# Altium PCB netuitval.PcbDoc (part 2 of 2)
Units mil, origin at the board's own origin, x right, y up, seen from the top; angles counter-clockwise.
Board outline 3892 x 5388 mil, 2 copper layers (Top Layer, Bottom Layer); 66 components, 53 nets, 247 pads, 55 vias.
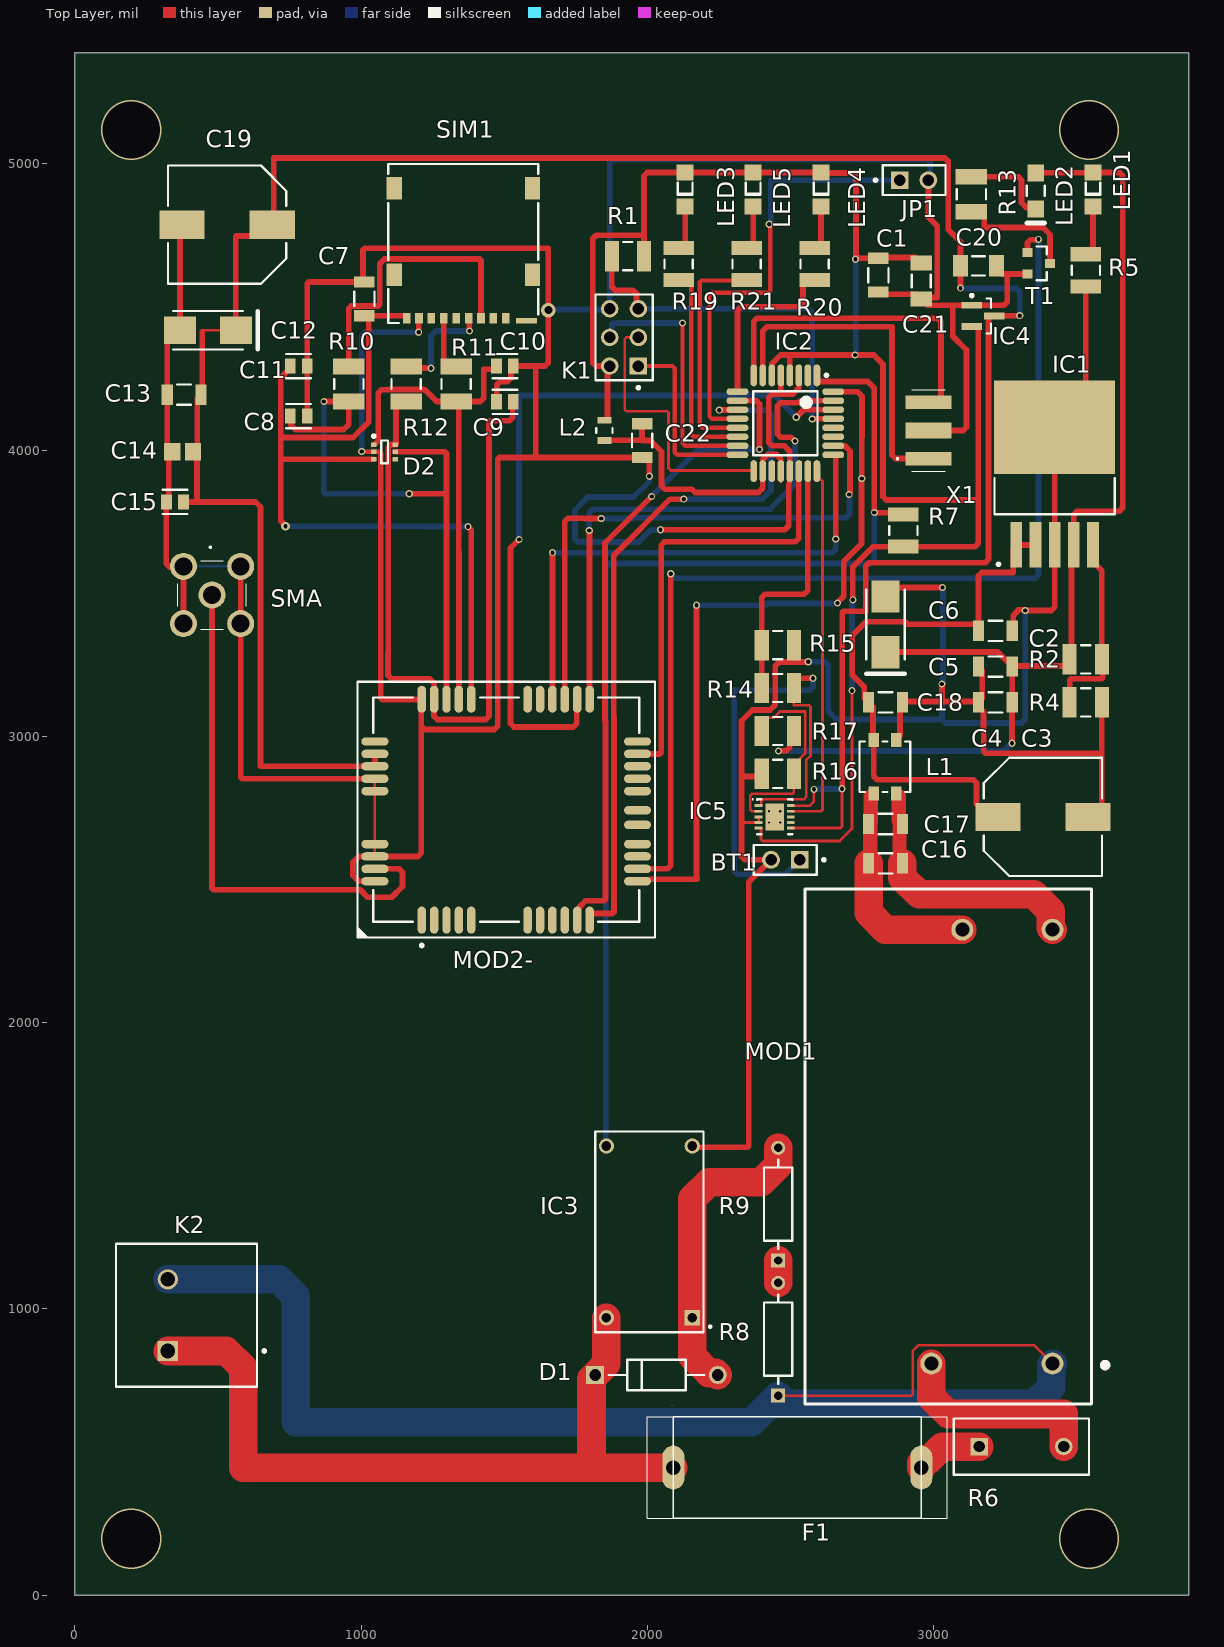
[diagram p0: Top Layer view]

## Via types
v1: diameter 25, hole 15, Top Layer to Bottom Layer, 45 vias
v2: diameter 210, hole 200, Top Layer to Bottom Layer, 4 vias
v3: diameter 19.68, hole 7.87, Top Layer to Bottom Layer, 4 vias
v4: diameter 50, hole 28, Top Layer to Bottom Layer, 1 vias
v5: diameter 30, hole 15, Top Layer to Bottom Layer, 1 vias

## Nets (pads, with @x,y where several pads share a name; then routed paths per layer and width w, separated by ;. In a path a pad name is that pad's centre, name@x,y a point inside that pad or via, vN(x,y) a via of type N, cw(c..) or ccw(c..) an arc to the next point about the centre after c; other vN are vias at no path point) (continued)
RXD: (continued)
  Top Layer w20: v1(1797,3719) 1797.67,3718.33 1797.67,3130.5 MOD2-.21 ; v1(2516,4032) 2514.65,4032 2501.58,4045.06 2466.22,4045.06 2454.5,4056.78 2454.5,4154.28 2466.22,4166 2528.93,4166 2535.67,4172.74 2609.26,4172.74
  Bottom Layer w20: v1(1797,3719) 1797,3782.28 1808.72,3794 2429,3794 2516,3881 v1(2516,4032)
SCK: IC2.17 K1.3 | length 950.1
  Top Layer w9: K1.3 1926.27,4394 1921,4388.73 1921,4141.27 1926.27,4136 2068.58,4136 2073.85,4130.73 2073.85,3937.42 2082.27,3929 2369.44,3929 IC2.17
SIM1_CLK: C9.2 D2.6 MOD2-.30 R12.2 | length 2677.9
  Top Layer w9: R12.2@1122.07,4169.98 R12.2 ; MOD2-.30@1255.03,3091 MOD2-.30
  Top Layer w20: R12.2@1122.07,4169.98 1122.07,4019.59 D2.6 1105.59,4019.59 1095,4009 1095,3289.86 1093.82,3288.68 1093.82,3213.54 1105.54,3201.82 1238.46,3201.82 1256,3184.28 1256,3130.79 MOD2-.30 ; MOD2-.30@1255.03,3091 1255.03,3070.72 1266.75,3059 1435.28,3059 1447,3070.72 1447,4102.73 1518.28,4102.73 1530,4114.44 1530,4167 C9.2
SIM1_DATA: C8.1 D2.5 MOD2-.29 R10.1 | length 2202.6
  Top Layer w9: 1293.07,3994 1298.34,3988.73
  Top Layer w20: C8.1 755,4116.47 755,4087.72 770.72,4072 939,4072 957,4090 R10.1 v1(869.95,4169.98) ; D2.5 1293.07,3994 ; v1(1168,3848) 1298.34,3848 ; MOD2-.29 1298.34,3848 ; 1298.34,3988.73 1298.34,3848
  Bottom Layer w9: 869.95,3853.27 875.22,3848
  Bottom Layer w20: 869.95,3853.27 v1(869.95,4169.98) ; 875.22,3848 v1(1168,3848)
SIM1_RST: C10.1 D2.1 MOD2-.28 R11.2 | length 1759.6
  Top Layer w9: 1094.83,4211 1095.88,4212.04 ; 1218.12,4212.04 1219.17,4211 1223,4211 ; 1341,3645.65 1341.65,3645
  Top Layer w20: D2.1@1049.94,4022.96 1060,4033.02 1060,4199.28 1071.72,4211 1094.83,4211 ; 1095.88,4212.04 1218.12,4212.04 ; 1223,4211 1264.02,4169.98 R11.2 1416.28,4169.98 1428,4181.7 1428,4282.28 1464.24,4282.28 1472.94,4290.98 C10.1 ; 1341,3645.65 R11.2@1341,4160.98 ; MOD2-.28 1341.65,3645
SIM1_VDD: C7.1 C11.1 D2.3 MOD2-.27 SIM1.C1 | length 3031
  Top Layer w9: 719,3967 720.41,3968.41 ; C7.1 1015.87,4469.72 C7.1@1031.06,4454.54 ; SIM1.C1@1150.28,4469.72 1158.97,4461.03 SIM1.C1 ; MOD2-.27 MOD2-.27@1388.88,3133.75
  Top Layer w20: 720.41,3968.41 D2.3 ; v5(736,3734) 736,3736.71 719,3753.71 719,3967 719,4044 ; C11.1 752.47,4286.13 719,4252.65 719,4044 ; C7.1@1007,4469.72 SIM1.C1@1150.28,4469.72 ; C7.1@1026.62,4454.54 1026.62,4098.62 972,4044 719,4044 ; v1(1373.5,3732.94) 1373.5,3731.59 1384.95,3720.13 1384.95,3137.68 MOD2-.27@1388.88,3133.75
  Bottom Layer w9: 1061.08,3734 1066.08,3739
  Bottom Layer w20: v5(736,3734) 1061.08,3734 1219.36,3734 1220.42,3732.94 v1(1373.5,3732.94)
STATUS: IC2.32 MOD2-.12 | length 2478.4
  Top Layer w9: 2173.64,2500.64 2178.91,2505.91
  Top Layer w20: MOD2-.12 2000.72,2494 2007.36,2500.64 2173.64,2500.64 ; 2172,2500.64 v1(2172,3458) ; v1(2664,3466) 2664,3467.35 2686,3489.35 2686,3611 2748,3673 2748,3896.46 2748.04,3896.51 2748.04,3900.04 v1(2749,3901) 2749,4045.45 2750,4046.45 2750,4188.6 2734.28,4204.31 2689.31,4204.31
  Bottom Layer w20: v1(2172,3458) 2411.68,3458 2417.68,3464 2647,3464
TXD: IC2.30 MOD2-.22 | length 2624.8
  Top Layer w20: v1(1552,3688) 1522,3658 1522,3044.72 1533.72,3033 1741.49,3033 1753.21,3044.72 1753.21,3128 MOD2-.22 ; v1(2520.35,4115) 2546.6,4141.25 IC2.30
  Bottom Layer w20: v1(1552,3688) 1552,4190.73 2444.63,4190.73 v1(2520.35,4115)
VDD_EXT: IC2.22 MOD2-.19 | length 1534.4
  Top Layer w9: 2043.73,2938.88 2049,2944.15
  Top Layer w20: MOD2-.19 2043.73,2938.88 ; 2049,2944.15 2049,3668.28 2060.72,3680 2517.28,3680 2529,3691.72 2529,3837 2529.24,3837.24 IC2.22
X1_1: IC2.7 X1.1 | length 1193.2
  Top Layer w20: IC2.7 2403.26,4416.28 2417.98,4431 2855,4431 2855,3982.72 2866.72,3971 2981.38,3971 X1.1
X1_3: IC2.8 X1.3 | length 1190
  Top Layer w9: X1.3@2962,4167.23 X1.3
  Top Layer w20: IC2.8 2371.76,4449.28 2383.48,4461 3014.28,4461 3026,4449.28 3026,4180.85 3012.38,4167.23 X1.3
pads on no net: D2.4 IC2.2 IC2.19 IC2.27 IC2.28 IC5.7 IC5.8 IC5.11 MOD2-.1 MOD2-.2 MOD2-.3 MOD2-.4 MOD2-.5 MOD2-.6 MOD2-.7 MOD2-.8 MOD2-.9 MOD2-.14 MOD2-.15 MOD2-.16 MOD2-.17 MOD2-.18 MOD2-.20 MOD2-.25 MOD2-.26 MOD2-.32 MOD2-.41 MOD2-.42 SIM1.C4 SIM1.C6 SIM1.C8 SIM1.Shield SIM1.SW
copper on no net:
  other v2: 196.85,196.85 3543.31,196.85
  other v3: 2425.31,2699.32 2464.68,2699.32 2425.31,2738.69 2464.68,2738.69

## Polygon pours and split planes (outlines as drawn)
GND on Bottom Layer "GND_L02_P002" (solid, pour order 2): 3862,5373.07 3862,5373 3862,2501 3869,2493 2387,2493 2381.5,2487.5 2387,2482 2387,1527 32,1527 2,1497 2,5380

## Other copper
Multi-Layer:
  region net K2_2: 2084,662 2085,663 2091,663

## Silkscreen, mask and mechanical layers (free items; w line width, h text height)
boardoutline:
  lines w10: 0,0 2566,0 3890,0 3892,2 3892,5383 3890,5385 5,5385 0,5390 0,5370 0,0
boardoutline2:
  lines w10: 0,5400 880,5400